# Altium PCB Bottom Light Array.PcbDoc
Units mm, origin at the board's own origin, x right, y up, seen from the top; angles counter-clockwise.
Board outline 157 x 93 mm, 2 copper layers (Top Layer, Bottom Layer), stack 1.621 mm thick; 5 components, 0 nets, 9 pads, 0 vias.
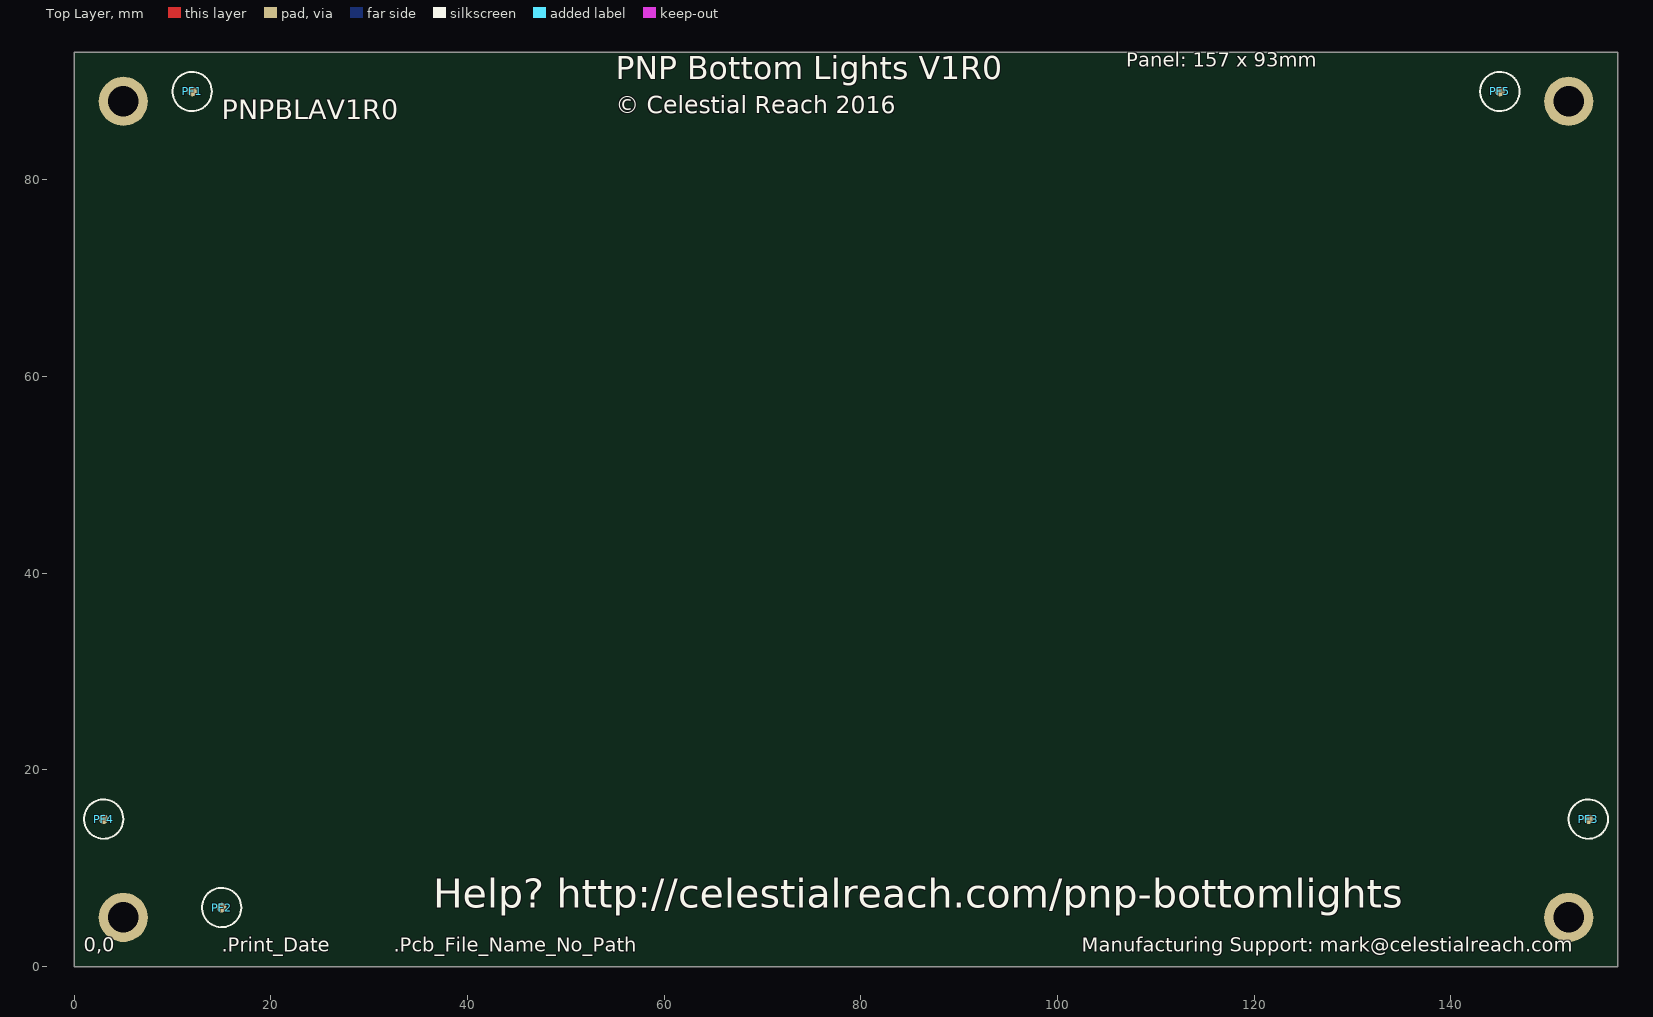
[diagram p0: Top Layer view]
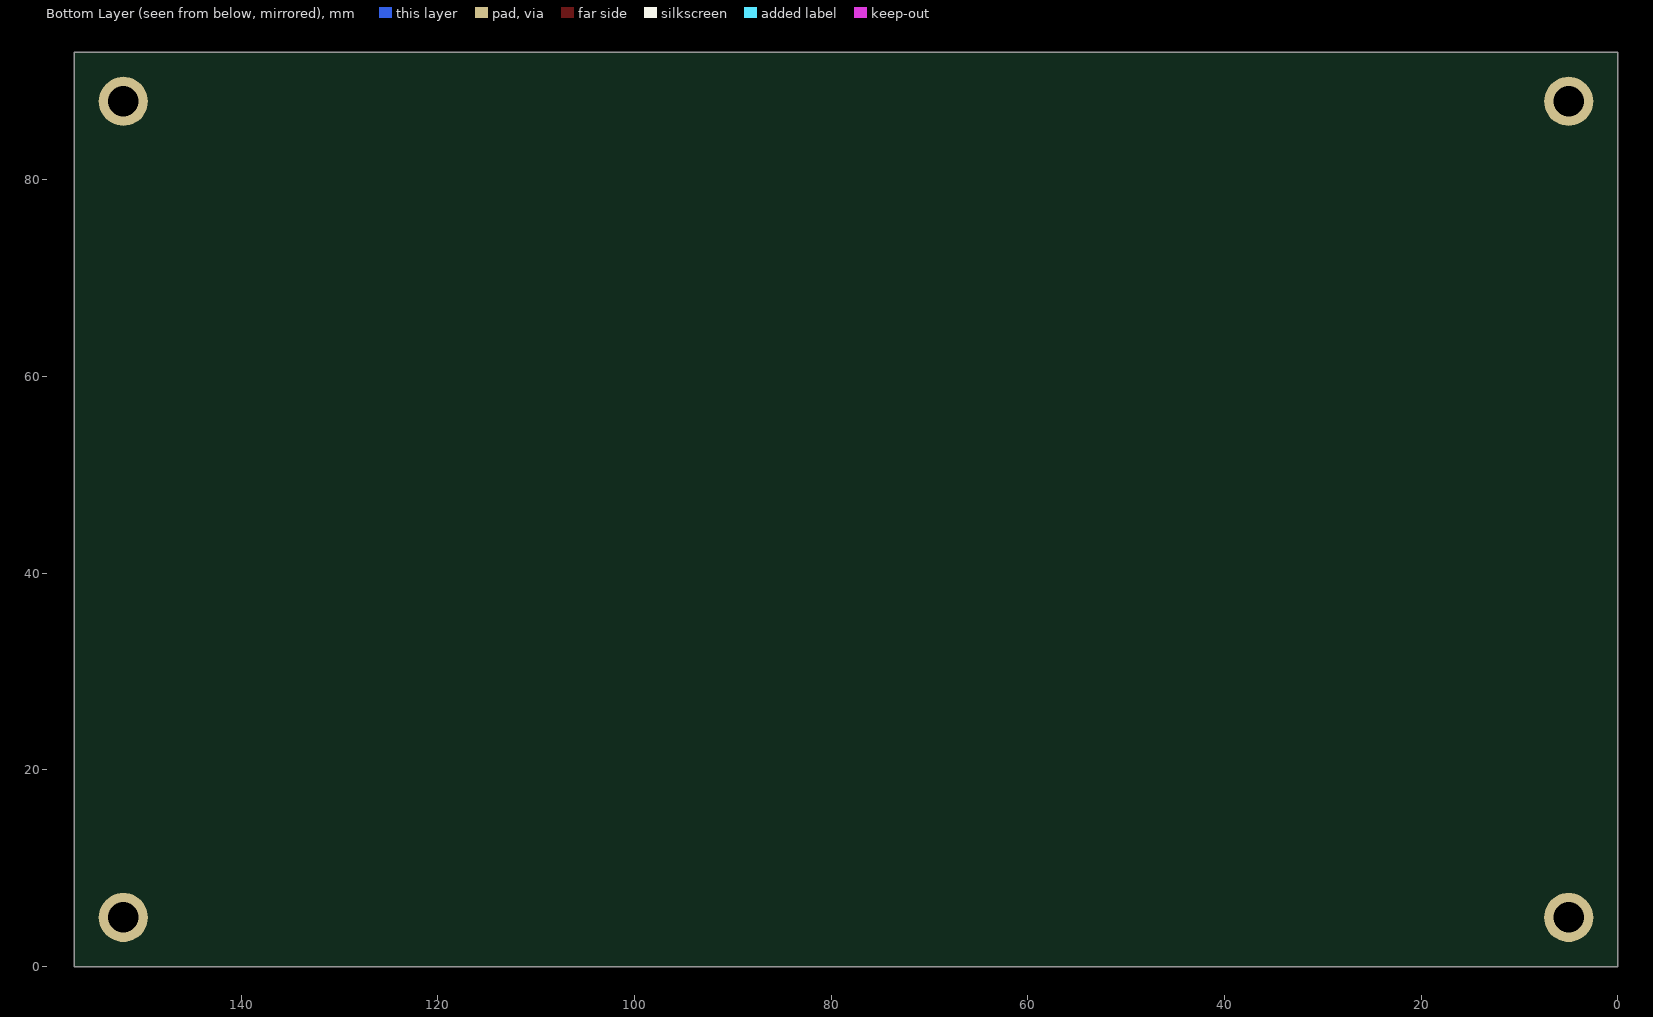
[diagram p1: Bottom Layer view, seen from below]

## Layer stack, top to bottom
Top Solder: solder mask 0.0102, Solder Resist, Dk 3.5
Top Layer: signal copper 0.0356
Dielectric1: core 1.55, FR-4, Dk 4.8
Bottom Layer: signal copper 0.0356
Bottom Solder: solder mask 0.0102, Solder Resist, Dk 3.5

## Board outline
0,0 157,0 157,93 0,93

## Design rules (kind name [scope] priority, off if disabled: settings)
Clearance PadClearance [IsPad vs IsPad] p1: gap=0.2
Clearance [All] p2: gap=0.2
HoleSize [All] p1: absolutevalues=TRUE maxlimit=6 minlimit=0.4 maxpercent=80.000 minpercent=20.000
HoleToHoleClearance [All] p1: gap=0.2 allowstackedmicrovias=TRUE
MinimumSolderMaskSliver [All] p1: minsoldermaskwidth=0
PolygonConnect ViaConnect [IsVia] p1: connectstyle=Direct reliefconductorwidth=0.254 reliefentries=4 polygonreliefangle="90 Angle" airgapwidth=0.254
PolygonConnect [All] p2: connectstyle=Direct reliefconductorwidth=0.3 reliefentries=4 polygonreliefangle="90 Angle" airgapwidth=0.254
RoutingVias [All] p1: holewidth=0.6 width=1 viastyle="Through Hole" minholewidth=0.4 minwidth=0.8 maxholewidth=5 maxwidth=6
SilkToSilkClearance [All] p1: silktosilkclearance=0
SilkToSolderMaskClearance SilkscreenOverComponentPads [IsPad] p1: minsilkscreentomaskgap=0.05 clearancetoexposedcopper=TRUE
SolderMaskExpansion "Via Tenting" [IsVia] p1: expansion=-2
SolderMaskExpansion [All] p2: expansion=0.102
Width [All] p1: maxlimit=2 minlimit=0.2 preferedwidth=0.4
25 further rules are at their usual default settings.

## Components (designator, comment, footprint, x,y, rotation, side; value= is the part's Value field where it differs from the comment)
PF1 "Comment" Fiducial 12,89 r0 top
PF2 "Comment" Fiducial 15,6 r0 top
PF3 "Comment" Fiducial 154,15 r0 top
PF4 "Comment" Fiducial 3,15 r0 top
PF5 "Comment" Fiducial 145,89 r0 top

## Footprints (in the part's own frame and the unit in brackets; to place one, negate y for a bottom-side part, rotate by r counter-clockwise, add the part's x,y. Pads: shape width x height; smd on the part's side, far side on the other; paste and mask are expansions set on the pad)
Fiducial [mm]
  round 1 smd paste-1 mask+1: F(0,0)

## Free pads (board coordinates)
  round 5 hole 3.1: 1(5,5) 2(152,5) 3(152,88) 4(5,88)

## Nets (pads, with @x,y where several pads share a name; then routed paths per layer and width w, separated by ;. In a path a pad name is that pad's centre, name@x,y a point inside that pad or via, vN(x,y) a via of type N, cw(c..) or ccw(c..) an arc to the next point about the centre after c; other vN are vias at no path point)
pads on no net: PF1.F PF2.F PF3.F PF4.F PF5.F

## Silkscreen, mask and mechanical layers (free items; w line width, h text height)
Top Overlay:
  circle w0.2: c145,89 r2
  circle w0.2: c154,15 r2
  circle w0.2: c15,6 r2
  circle w0.2: c3,15 r2
  circle w0.2: c12,89 r2
  text "Panel: 157 x 93mm" at 107,91 h2.5
  text "PNP Bottom Lights V1R0" at 55.072,89.5 h4
  text "PNPBLAV1R0" at 15,86.158 h2
  text "© Celestial Reach 2016" at 55.072,86.158 h3
  text "Help? http://celestialreach.com/pnp-bottomlights" at 36.5,5 h5
  text "0,0" at 1,1 h2.5
  text ".Print_Date" at 15,1 h2.5
  text ".Pcb_File_Name_No_Path" at 32.5,1 h2.5
  text "Manufacturing Support: mark@celestialreach.com" at 102.5,1 h2.5
Outlines:
  the board outline again, w0.2
Documentation:
  text "VSCORE -->" at -25,82 h5
  text "VSCORE -->" at -25,47 h5
  text "VSCORE -->" at -25,44 h5
  text "VSCORE -->" at -24,9 h5
  text "Mechanical 9 = Board Outlines" at -23,-5 h5
  text "Mechanical 30 = VScore" at -23,-9 h5
  text "This is a documentation layer." at 38,-10 h8
  text "Mechanical 31 = Milling" at -23,-13 h5
  text "Do not add tabs. Must be VScore + Milled" at 42,-16 h5
VScore:
  lines w0.2: -6,45.41 161,45.41 ; -6,82.82 161,82.82 ; -3,10 162,10 ; -3,47.41 162,47.41

## Panel: embedded boards
"Light Wedge.PcbDoc" at 115,10, 2 rows x 2 columns, spacing 67 x 37.41, rotation 90
"Light Wedge.PcbDoc" at 43,82.82, 2 rows x 2 columns, spacing 67 x 37.41, rotation 270